# EAGLE board microrovmk1 (EAGLE 7.2.0)
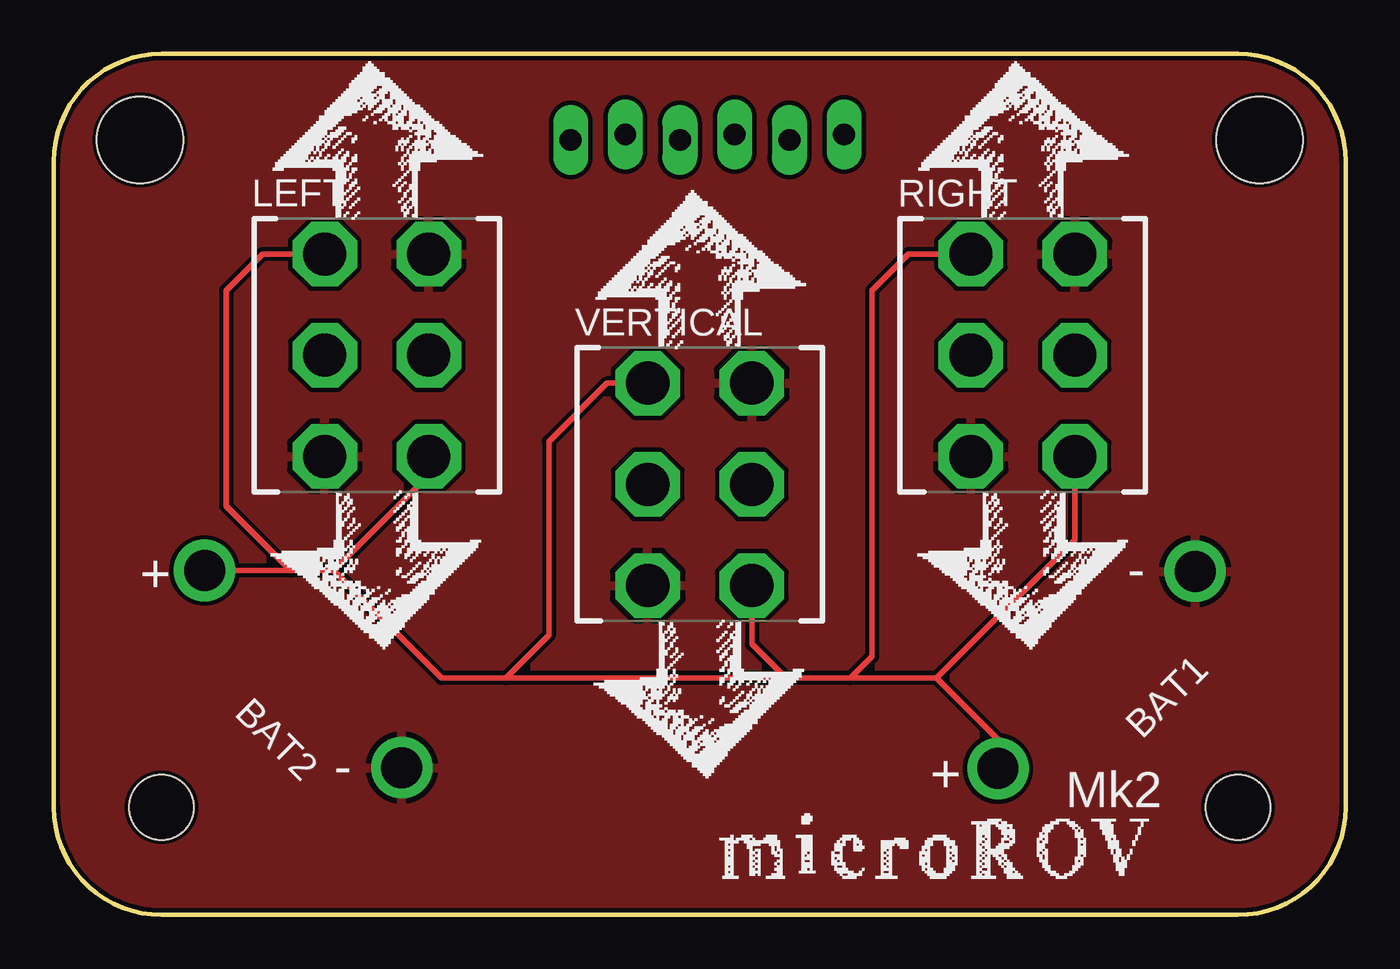
[diagram p0: board, top side]
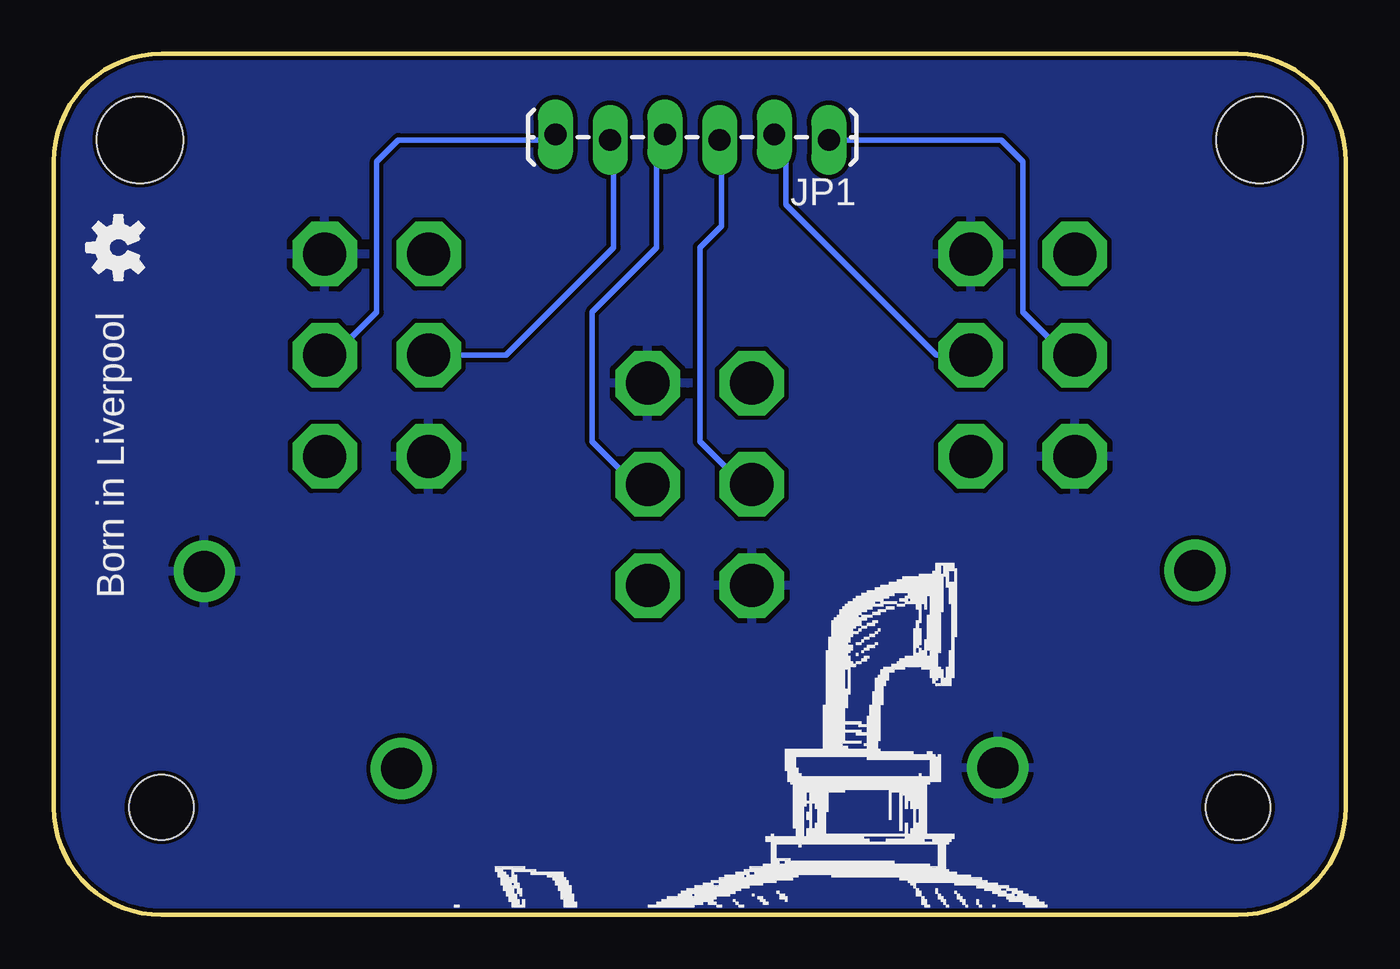
[diagram p1: board, bottom side, seen from below]

Size 60 x 40 mm. Coordinates in mm from the lower left corner, seen from the top.
Outline: 60,35 60,5 arc-90 55,0 5,0 arc-90 0,5 0,35 arc-90 5,40 55,40 arc-90 60,35
Copper layers (1*16): Top 0.035mm / dielectric 1.5mm / Bottom 0.035mm
Design rules "SparkFun-2-layer": minimum track width 7mil, minimum drill 15mil, track to track 8mil, track to pad 8mil, pad to pad 8mil, via to via 8mil, smd to smd 8mil, copper to edge 8mil, drill to drill 8mil, minimum pad ring 12mil, minimum via ring 10mil, stop-mask expansion 4mil, vias tented up to drill 20mil, thermal gap 10mil
Holes 4 mm at 4,36 56,36
Holes 3 mm at 5,5 55,5

## Footprints (pad centres in the part's own frame; a part is rotated, then mirrored left to right if it is on the bottom)
BATTCON_9V = drill 1.905: + 0,0; - 0,-12.954
1X06_LOCK_LONGPADS = drill 1.016 long: 1 0,0; 2 2.54,-0.254; 3 5.08,0; 4 7.62,-0.254; 5 10.16,0; 6 12.7,-0.254
T8012A = drill 2 pad 3 octagon: 1 2.415,-4.7; 2 2.415,0; 3 2.415,4.7; 4 -2.415,-4.7; 5 -2.415,0; 6 -2.415,4.7

## Placement (x,y rotation side)
BAT1  [BATTCON_9V]  43.85,6.8 135 top
BAT2  [BATTCON_9V]  7,16 45 top
JP1  [1X06_LOCK_LONGPADS]  24,36 180 bottom
LEFT  T8012ADPDT  [T8012A]  15,26 0 top
RIGHT  T8012ADPDT  [T8012A]  45,26 0 top
U$1  [OSHW-LOGO-S]  57,31 90 bottom
U$2  [RIGHTARROW]  20,25.5 90 top
U$3  [RIGHTARROW]  10,26.5 270 top
U$4  [RIGHTARROW]  35,19.5 90 top
U$5  [RIGHTARROW]  25,20.5 270 top
U$6  [MICROROV]  30.35,0.6 0 top
U$7  [RIGHTARROW]  50,25.5 90 top
U$8  [SUBTOP]  23.7,-0.35 0 bottom
U$9  [RIGHTARROW]  40.05,26.5 270 top
VERTICAL  T8012ADPDT  [T8012A]  30,20 0 top

## Library data of the parts
BAT1 BAT2 = SparkFun-Electromechanical
JP1 = SparkFun-Connectors
LEFT RIGHT U$2-U$9 VERTICAL = microROV
U$1 = SparkFun-Aesthetics

## Nets
GND: BAT1.- BAT2.- LEFT.3 LEFT.4 RIGHT.3 RIGHT.4 VERTICAL.3 VERTICAL.4
LGND: JP1.1 LEFT.5
LVCC: JP1.2 LEFT.2
RGND: JP1.5 RIGHT.5
RVCC: JP1.6 RIGHT.2
VCC: BAT1.+ BAT2.+ LEFT.1 LEFT.6 RIGHT.1 RIGHT.6 VERTICAL.1 VERTICAL.6
VGND: JP1.3 VERTICAL.5
VVCC: JP1.4 VERTICAL.2

## Tracks (layer width: path | path; a pad name or v marks a point on that pad's centre or on a via)
GND
  pour Top: 0,0 60,0 60,40 0,40
  pour Bottom: 0,0 60,0 60,40 0,40
LGND
  Bottom 0.254: LEFT.5 13,26 15,28 15,35 16,36 JP1.1
LVCC
  Bottom 0.254: LEFT.2 19,26 26,33 26,35.71 JP1.2
RGND
  Bottom 0.254: RIGHT.5 39,26 34,31 34,35.84 JP1.5
RVCC
  Bottom 0.254: RIGHT.2 47,26 45,28 45,35 44,36 36.95,36 JP1.6
VCC
  Top 0.254: BAT1.+ 43.85,8.15 41,11 | 41,11 37,11 | 37,11 34,11 | 34,11 21,11 | 21,11 18,11 13,16 | 13,16 11,16 | 11,16 BAT2.+ | RIGHT.1 47.41,17.41 41,11 | LEFT.1 17.41,20.41 13,16 | VERTICAL.1 32.41,12.59 34,11 | VERTICAL.6 25.7,24.7 23,22 23,13 21,11 | RIGHT.6 39.7,30.7 38,29 38,12 37,11 | LEFT.6 9.7,30.7 8,29 8,19 11,16
VGND
  Bottom 0.254: VERTICAL.5 28,20 30,22 30,31 29,32 29,35.92 JP1.3
VVCC
  Bottom 0.254: VERTICAL.2 33,20 35,22 35,28 32,31 32,35.87 JP1.4

## Text on the board
tPlace: + | - | - | + | Mk2
bPlace: Born in Liverpool